# Altium PCB DC_Stepper.PcbDoc
Units mil, origin at the board's own origin, x right, y up, seen from the top; angles counter-clockwise.
Board outline 2362.2 x 3661.42 mil, 2 copper layers (Top Layer, Bottom Layer); 48 components, 46 nets, 243 pads, 79 vias.
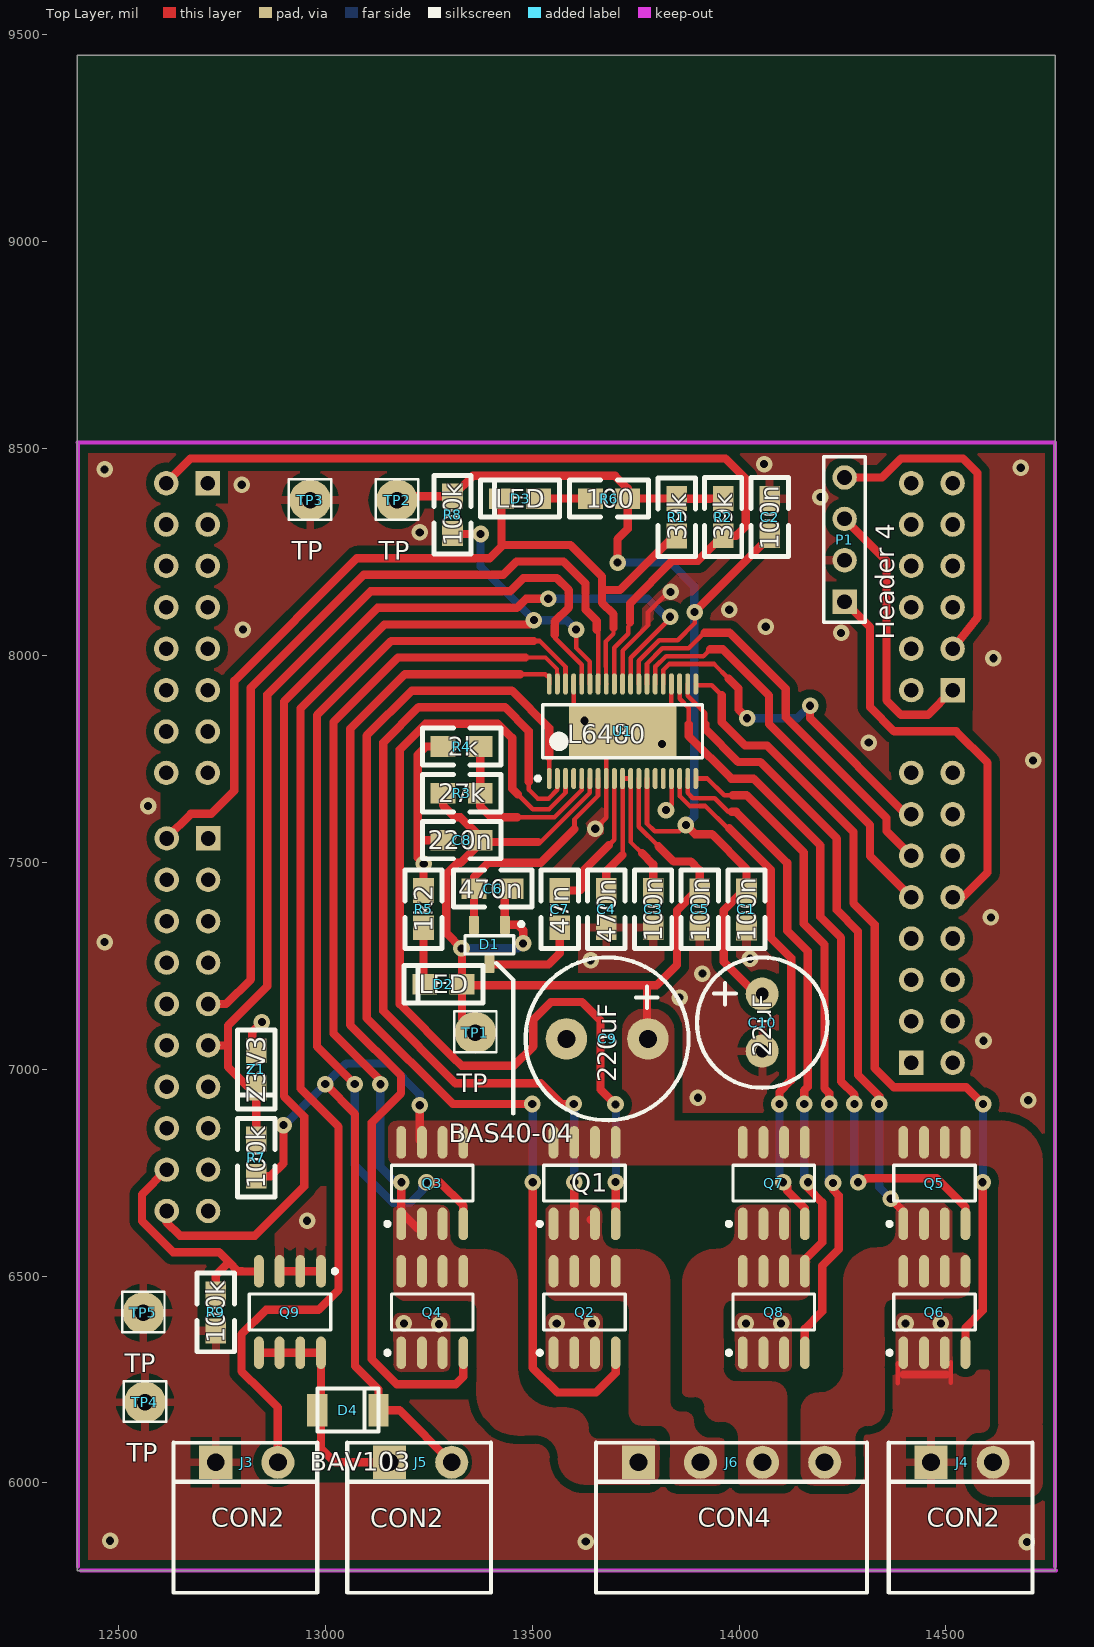
[diagram p0: Top Layer view]
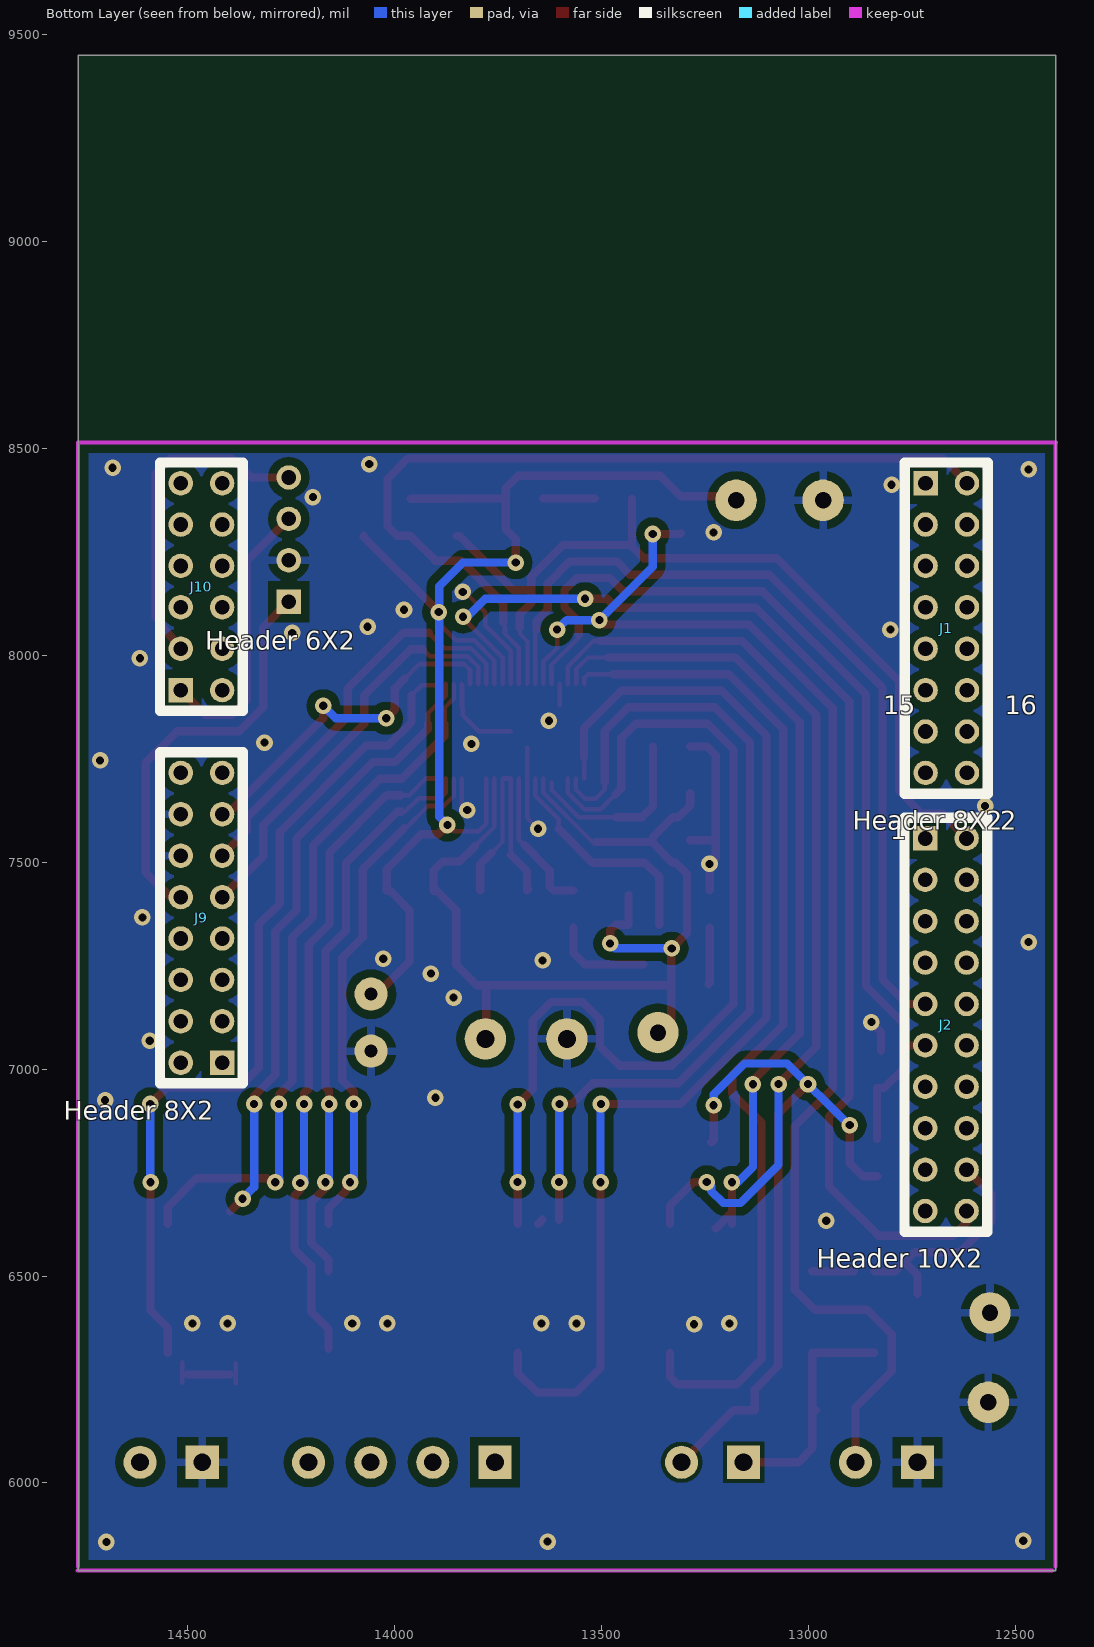
[diagram p1: Bottom Layer view, seen from below]

## Layer stack, top to bottom
Top Solder: solder mask 0.4, Solder Resist, Dk 3.5
Top Layer: signal copper 1.4
Dielectric1: dielectric 12.6, FR-4, Dk 4.8
Bottom Layer: signal copper 1.4
Bottom Solder: solder mask 0.4, Solder Resist, Dk 3.5

## Board outline
12401.57,5787.4 14763.78,5787.4 14763.78,9448.82 12401.57,9448.82 12401.57,5787.4

## Design rules (kind name [scope] priority, off if disabled: settings)
Clearance [All] p1 off: gap=20
Clearance L6480 [(InComponent('U*'))and ispad vs (InComponent('U*'))and ispad] p2: gap=7
Clearance "Schematic Clearance Constraint" [InNetClass('NetL6480')] p3: gap=8 except(7: Via-Text SMDPad-Text Fill-Text Poly-Text Track-Text Text-Text Arc-Text Region-Text THPad-Text)
Clearance Clearance_1 [All] p4: gap=20
PlaneClearance [All] p1: clearance=30
PolygonConnect PolygonConnect_Q [InNet('NetJ6_4')  or InNet('NetJ6_3') or InNet('VS')or InNet('NetJ6_2') or InNet('NetJ6_1') vs OnBottomLayer or OnTopLayer] p1: connectstyle=Direct reliefconductorwidth=10 reliefentries=4 polygonreliefangle="90 Angle" airgapwidth=10
PolygonConnect PolygonConnect_Via [IsVia vs OnBottomLayer Or OnTopLayer] p2: connectstyle=Direct reliefconductorwidth=35 reliefentries=4 polygonreliefangle="90 Angle" airgapwidth=10
PolygonConnect PolygonConnect_1 [All] p3: connectstyle=Relief reliefconductorwidth=20 reliefentries=4 polygonreliefangle="90 Angle" airgapwidth=20
RoutingVias [All] p1: holewidth=20 width=40 viastyle="Through Hole" minholewidth=20 minwidth=40 maxholewidth=20 maxwidth=40
SilkToSolderMaskClearance SilkscreenOverComponentPads [IsPad] p1: minsilkscreentomaskgap=10 clearancetoexposedcopper=TRUE
SolderMaskExpansion [All] p1: expansion=4
UnpouredPolygon [All] p1: allowunpoured=FALSE
Width [All] p1: maxlimit=40 minlimit=10 preferedwidth=20
27 further rules are at their usual default settings.

## Classes and differential pairs
net class NetL6480: 3V3 5V GND INT3V3 IRQ NetC2_1 NetC3_1 NetC4_1 NetC5_1 NetC6_1 NetC7_1 NetC7_2 NetD2_K NetD3_A NetD3_K NetD4_A NetJ1_2 NetJ2_9 NetJ2_11 NetJ2_18 NetJ3_2 NetJ6_1 NetJ6_2 NetJ6_3 NetJ6_4 NetQ1_4 NetQ2_4 NetQ3_4 NetQ4_4 NetQ5_4 NetQ6_4 NetQ7_4 NetQ8_4 NetR3_1 PTA4 SPI0_CLK SPI0_CS SPI0_MISO SPI0_MOSI SPI1_CS SPI1_MISO SPI1_MOSI SPI1_SCLK UART0_RX UART0_TX VS

## Components (designator, comment, footprint, x,y, rotation, side; value= is the part's Value field where it differs from the comment)
C1 "100n" 0805 14018.06,7430.87 r270 top
C2 "100n" 0805 14074,8288.46 r90 top
C3 "100n" 0805 13792.52,7431.28 r270 top
C4 "470n" 0805 13679.52,7431.28 r270 top
C5 "100n" 0805 13905.06,7430.87 r270 top
C6 "470n" 0805 13359.77,7435.87 r0 top
C7 "47n" 0805 13567,7431.28 r270 top
C8 "220n" 0805 13285,7553 r0 top
C9 "220uF" ELKO_220UF 13681.43,7073 r180 top
C10 "22uF" ELKO_22UF 14056,7112.1 r270 top
D1 "BAS40-04" "SOT-23 3L" 13397,7301 r90 top
D2 "LED" LED 13331,7205 r180 top
D3 "LED" LED 13516,8378 r180 top
D4 "BAV103" SOD-80 12981.36,6176 r0 top
J1 "Header 8X2" HDR2X8 12716.54,8415.35 r270 bottom
J2 "Header 10X2" HDR2X10 12717.52,7557.09 r270 bottom
J3 "CON2" HEADER_1X2_3.81 12736,6050 r270 top
J4 "CON2" HEADER_1X2_3.81 14464,6050 r270 top
J5 "CON2" HEADER_1X2_3.81 13156,6050 r270 top
J6 "CON4" Header_1x4_3.81-H 13757,6050 r270 top
J9 "Header 8X2" HDR2X8 14415.94,7015.35 r90 bottom
J10 "Header 6X2" HDR2X6 14515.95,7915.35 r90 bottom
P1 "Header 4" HDR1X4 14255,8129 r90 top
Q1 "Si4178DY" SO-8_N 13627,6724.43 r90 top
Q2 "Si4178DY" SO-8_N 13627,6413 r90 top
Q3 "Si4178DY" SO-8_N 13259,6724.43 r90 top
Q4 "Si4178DY" SO-8_N 13259,6413 r90 top
Q5 "Si4178DY" SO-8_N 14472,6724.43 r90 top
Q6 "Si4178DY" SO-8_N 14472,6413 r90 top
Q7 "Si4178DY" SO-8_N 14084,6724.43 r90 top
Q8 "Si4178DY" SO-8_N 14084,6413 r90 top
Q9 "Si4178DY" SO-8_N 12915.18,6413 r270 top
R1 "39k" 0805 13849.39,8287.91 r90 top
R2 "39k" 0805 13961.59,8288.46 r90 top
R3 "27k" 0805 13375,7666 r180 top
R4 "2k" 0805 13285,7779 r0 top
R5 "1k2" 0805 13238,7431.28 r270 top
R6 "100" 0805 13641,8378 r0 top
R7 "100k" 0805 12834,6831 r270 top
R8 "100k" 0805 13308,8294 r90 top
R9 "100k" 0805 12736,6367 r90 top
TP1 "TP" TP2.54-1.0 13363,7088 r0 top
TP2 "TP" TP2.54-1.0 13174,8374 r0 top
TP3 "TP" TP2.54-1.0 12964,8374 r0 top
TP4 "TP" TP2.54-1.0 12565,6195 r0 top
TP5 "TP" TP2.54-1.0 12561,6411 r0 top
U1 "L6480" HTSSOP38 13895.8,7701.84 r90 top
Z1 "Z3V3" LED 12834,7044 r270 top

## Footprints (in the part's own frame and the unit in brackets; to place one, negate y for a bottom-side part, rotate by r counter-clockwise, add the part's x,y. Pads: shape width x height; smd on the part's side, far side on the other; paste and mask are expansions set on the pad)
0805 [mil]
  rect 60x50 smd: 1(0,0) 2(90,0)
  silkscreen extent -50,-45 140,45
ELKO_22UF [mil] "NKR220M1CE11VU"
  round 80 hole 31: A(-68.9,0) K(68.9,0)
  silkscreen extent -157,-157 157,157
ELKO_220UF [mm]
  round 2.54 hole 1.1: A(-2.5,0) K(2.5,0)
  silkscreen extent -5,-5 5,5
HDR1X4 [mm] "Connector; Header; 4 Position"
  rect 1.5x1.5 hole 0.9: 1(0,0)
  round 1.5 hole 0.9: 2(2.54,0) 3(5.08,0) 4(7.62,0)
  silkscreen extent -1.27,-1.27 8.89,1.27
HDR2X6 [mm]
  rect 1.5x1.5 hole 0.9: 1(0,0)
  round 1.5 hole 0.9: 2(0,-2.54) 3(2.54,0) 4(2.54,-2.54) 5(5.08,0) 6(5.08,-2.54) 7(7.62,0) 8(7.62,-2.54) 9(10.16,0) 10(10.16,-2.54) 11(12.7,0) 12(12.7,-2.54)
  silkscreen extent -1.27,-3.81 13.97,1.27
HDR2X8 [mm] "Connector; Header; 8x2 Position"
  rect 1.5x1.5 hole 0.9: 1(0,0)
  round 1.5 hole 0.9: 2(0,2.54) 3(2.54,0) 4(2.54,2.54) 5(5.08,0) 6(5.08,2.54) 7(7.62,0) 8(7.62,2.54) 9(10.16,0) 10(10.16,2.54) 11(12.7,0) 12(12.7,2.54) 13(15.24,0) 14(15.24,2.54) 15(17.78,0) 16(17.78,2.54)
  silkscreen extent -1.27,-1.27 19.05,3.81
HDR2X10 [mm] "Connector; Header; 10x2 Position"
  rect 1.5x1.5 hole 0.9: 1(0,0)
  round 1.5 hole 0.9: 2(0,2.54) 3(2.54,0) 4(2.54,2.54) 5(5.08,0) 6(5.08,2.54) 7(7.62,0) 8(7.62,2.54) 9(10.16,0) 10(10.16,2.54) 11(12.7,0) 12(12.7,2.54) 13(15.24,0) 14(15.24,2.54) 15(17.78,0) 16(17.78,2.54) 17(20.32,0) 18(20.32,2.54) 19(22.86,0) 20(22.86,2.54)
  silkscreen extent -1.27,-1.27 24.13,3.81
HEADER_1X2_3.81 [mil]
  rect 80x80 hole 43.31: 1(0,0)
  round 80 hole 43.31: 2(0,150)
  silkscreen extent -47,-102 315,245
Header_1x4_3.81-H [mil]
  rect 80x80 hole 43.31: 1(0,0)
  round 80 hole 43.31: 2(0,150) 3(0,300) 4(0,450)
  silkscreen extent -47,-102 315,552
HTSSOP38 [mm] "L6480"
  rect 3.3x6.6 smd: 0(2.9,4.5)
  oval 1.3x0.3 smd: 1(0,9) 2(0,8.5) 3(0,8) 4(0,7.5) 5(0,7) 6(0,6.5) 7(0,6) 8(0,5.5) 9(0,5) 10(0,4.5) 11(0,4) 12(0,3.5) 13(0,3) 14(0,2.5) 15(0,2) 16(0,1.5) 17(0,1) 18(0,0.5) 19(0,0) 20(5.8,0) 21(5.8,0.5) 22(5.8,1) 23(5.8,1.5) 24(5.8,2) 25(5.8,2.5) 26(5.8,3) 27(5.8,3.5) 28(5.8,4) 29(5.8,4.5) 30(5.8,5) 31(5.8,5.5) 32(5.8,6) 33(5.8,6.5) 34(5.8,7) 35(5.8,7.5) 36(5.8,8) 37(5.8,8.5) 38(5.8,9)
  silkscreen extent -0.12,-0.4 4.52,9.82
LED [mil]
  rect 60x50 smd: A(0,0) K(90,0)
  silkscreen extent -50,-45 140,45
SO-8_N [mm] "SOIC, 8-Leads, Body 4.9x3.9mm, Pitch 1.27mm, IPC Medium Density"
  oval 2x0.6 smd: 1(-2.5,1.905) 2(-2.5,0.635) 3(-2.5,-0.635) 4(-2.5,-1.905) 5(2.5,-1.905) 6(2.5,-0.635) 7(2.5,0.635) 8(2.5,1.905)
  silkscreen extent -2.62,-2.5 1.1,2.88, body extent -2,-2.5 2,2.5, height 1.75
SOD-80 [mm]
  rect 1.25x2 smd: A(0,0) K(3.75,0)
  silkscreen extent 0,-1.32 3.75,1.32
"SOT-23 3L" [mm]
  rrect12% 1.1x0.6 smd: 1(1.2,-0.95) 2(1.2,0.95) 3(-1.2,0)
  silkscreen extent -0.58,-2.08 1.37,1.5, body extent -0.87,-1.5 0.87,1.5, height 1.1
TP2.54-1.0 [mm]
  round 2.54 hole 1: 1(0,0)
  silkscreen extent -1.3,-1.2 1.3,1.3

## Part data
C1 C2 C3 C4 C5 C6 C7 C8: library part C?, "Normaler Kondensator"
C9: library part "C? ELKO", "Elektrolyt /polarisierter Kondensator"
C10: library part ELKO_22uF
D1: library part BAV99
D4: library part D?, "Diode"
J1 J9: "Header, 8-Pin, Dual row"
J2: "Header, 10-Pin, Dual row"
J6: library part HEADER_4, "1x4_3.81-H"
J10: "Header, 6-Pin, Dual row"
P1: "Header, 4-Pin"
Q1 Q2 Q3 Q4 Q5 Q6 Q7 Q8 Q9: library part SI4412DY, "N-Channel 30V (D-S)  Rated MOSFET"
R1 R2 R3 R4 R5 R6 R7 R8 R9: library part R?, "Normaler Widerstand"
Z1: library part ZENER2

## Via types
v1: diameter 40, hole 19.68, Top Layer to Bottom Layer, tented both sides, 79 vias

## Nets (pads, with @x,y where several pads share a name; then routed paths per layer and width w, separated by ;. In a path a pad name is that pad's centre, name@x,y a point inside that pad or via, vN(x,y) a via of type N, cw(c..) or ccw(c..) an arc to the next point about the centre after c; other vN are vias at no path point)
3V3: J9.4
5V: J9.10 P1.1 | length 969.2
  Top Layer w20: P1.1 14316.42,8067.58 14316.42,7874.13 14374.72,7815.83 14524.66,7815.83 14600.47,7740.01 14600.47,7474.88 J9.10@14540.95,7415.35
GND: C1.2 C2.2 C3.2 C4.2 C5.2 C8.1 C9.K C10.K J3.1 J4.1 J9.12 J9.14 P1.2 Q2.1 Q2.2 Q2.3 Q4.1 Q4.2 Q4.3 Q6.1 Q6.2 Q6.3 Q8.1 Q8.2 Q8.3 Q9.1 Q9.2 Q9.3 R4.1 R5.1 R9.1 TP3.1 TP4.1 TP5.1 U1.0 U1.8 U1.16 U1.23 U1.29 U1.35 Z1.A | length 1645.1
  Top Layer w11: U1.35 13600.81,7929.91 U1.0@13600.81,7879.1 ; v1(13652.59,7580.46) 13679.27,7607.14 U1.8 U1.0@13679.27,7776.65 ; U1.0 13796.14,7816.02 13834.59,7854.46 13834.59,7872.46 13836.47,7874.34 13836.47,7929.91 U1.23 ; U1.29 13718.64,8010.38 13780.16,8071.9 13780.16,8103.38 13829.24,8152.46 v1(13834.59,8152.46) ; U1.16 13837.03,7701.56 v1@13837.03,7638.9 ; 14382.96,6240.46 14382.96,6289.77 ; 14511.96,6242.46 14511.96,6291.77
  Top Layer w20: Z1.A@12824,7044 12824,7089.87 v1(12847.59,7113.46) ; Q9.3 Q9.2 Q9.1 ; 13227.6,7552.46 13228.13,7553 C8.1 ; R5.1 13238,7495.46 v1(13238.59,7495.46) 13223.6,7510.46 13223.6,7758.46 13244.14,7779 R4.1 ; 14397.59,6262.09 14499.9,6262.09
  other v1: 14695.59,5857.46 13629.59,5858.46 12480.59,5860.46 13275.59,6383.46 13190.59,6385.46 13559.59,6385.46 13644.59,6385.46 14016.59,6385.46 14101.59,6385.46 14402.59,6385.46 14487.59,6385.46 12956.59,6633.46 14698.59,6924.46 13900.59,6930.46 14590.59,7068.46 13856.59,7172.46 13911.59,7230.46 13641.59,7262.46 14026.59,7266.46 12467.59,7306.46 14608.59,7366.46 13823.59,7625.46 12572.59,7635.46 14710.59,7745.46 13813.59,7785.46 14313.59,7788.46 13626.59,7841.46 14614.59,7992.46 14246.59,8053.46 12801.59,8061.46 14064.59,8068.46 13976.59,8109.46 13228.59,8296.46 14196.59,8381.46 12798.59,8411.46 12467.59,8448.46 14680.59,8452.46 14060.59,8461.46
INT3V3: C1.1 C2.1 C10.A R1.2 R2.2 R6.2 R8.2 TP2.1 U1.13 U1.27 | length 3066.3
  Top Layer w11: U1.27 13758.01,7986.56 13806.91,8035.46 13851.59,8035.46 13892.59,8076.46 v1(13892.59,8103.96) ; U1.13 13777.69,7592.69 13796.25,7574.13 13856.25,7574.13 v1(13871.59,7589.46)
  Top Layer w20: TP2.1 13184,8384 R8.2 13357,8433 13701,8433 13731,8403 R6.2 ; v1(13706.59,8223.46) 13706.59,8280.06 13731,8304.46 R6.2 ; v1(13871.59,7589.46) 13893.8,7567.26 13934.23,7567.26 14018.06,7483.43 C1.1 ; v1(13892.59,8103.96) 14074,8285.37 C2.1 ; R2.2@13961.04,8377.91 R1.2 13849.3,8378 R6.2 ; C1.1@14010.63,7430.87 13963.06,7383.3 13963.06,7259.29 C10.A@14041.34,7181
  Bottom Layer w20: v1(13706.59,8223.46) 13834.3,8223.46 13891.59,8166.18 13891.59,7609.46 v1@13884.59,7602.46
IRQ: J2.19
NetC2_1: 
NetC3_1: C3.1 C4.1 U1.10 U1.11 | length 603.6
  Top Layer w10: U1.11 13738.32,7548.62 13765.59,7521.35
  Top Layer w11: 13718.64,7517.23 U1.10 U1.11
  Top Layer w20: C4.1@13676.59,7434.21 C4.1 13679.52,7478.11 13718.64,7517.23 ; 13765.59,7521.35 13792.52,7494.42 C3.1
NetC4_1: 
NetC5_1: 
NetC6_1: C6.1 D1.2 U1.7 | length 551.9
  Top Layer w11: 13602.59,7579.7 13602.59,7603.04 13659.3,7659.75 13659.3,7701.56 U1.7
  Top Layer w20: D1.2 C6.1@13359.6,7435.7 ; C6.1 13359.77,7463.65 13394.13,7498 13520.89,7498 13602.59,7579.7
NetC7_1: C7.1 U1.9 | length 353.5
  Top Layer w11: 13685.59,7540.75 13698.95,7554.12 U1.9
  Top Layer w20: C7.1 13615.34,7431.28 13624.52,7440.46 13624.52,7479.68 13685.59,7540.75
NetC7_2: C7.2 D1.3 | length 241.5
  Top Layer w20: D1.3@13398.17,7252.59 13539.72,7252.59 13567,7279.87 C7.2
NetD2_K: D2.K R5.2 | length 137.5
  Top Layer w20: R5.2 13238,7208 D2.K
NetD3_A: D3.A R6.1 | length 125
  Top Layer w20: D3.A R6.1
NetD3_K: D3.K J2.2 R1.1 U1.31 | length 2158
  Top Layer w10: U1.31 13678.49,7930.97 13678.49,7971.78 13678.08,7972.19 13678.08,8032.96 13696.59,8051.46 13696.59,8065.67
  Top Layer w20: J2.2@12617.52,7558.57 12675.57,7616.61 12724.74,7616.61 12780.64,7672.51 12780.64,7937.75 13076.89,8234 13398.13,8234 13426,8261.87 D3.K ; 13427.54,8266 13592.85,8266 13669,8189.85 13669,8157.46 ; 13696.59,8065.67 13696.59,8098.74 13669,8126.33 13669,8157.46 ; R1.1 13842.76,8287.91 13712.31,8157.46 13669,8157.46
NetD4_A: D4.A J5.1 Q9.5 Q9.6 Q9.7 Q9.8 | length 563.4
  Top Layer w20: Q9.5 Q9.6 Q9.7 Q9.8@12981.18,6314.57 ; D4.A D4.A@12989.59,6167.77 ; 12989.59,6084.46 13024.06,6050 J5.1 ; 12990.18,6084.46 Q9.8
NetJ1_2: J1.2 R2.1 U1.30 | length 2116
  Top Layer w11: U1.30 13698.95,8017.83 13732.59,8051.46 13732.59,8068.18
  Top Layer w20: J1.2 12616.54,8416.84 12674.58,8474.88 13967.54,8474.88 14016.59,8425.84 14016.59,8311.46 13993.59,8288.46 R2.1 13901.04,8227.91 13839.33,8227.91 13736.59,8125.18 13736.59,8078.54
NetJ2_9: J2.9 U1.32 | length 2045.6
  Top Layer w11: U1.32 13659.58,8057.97
  Top Layer w20: J2.9@12709.95,7157.09 J2.9@12713.74,7160.87 ; J2.9 12760.95,7157.09 12820.64,7216.77 12820.64,7921.18 13093.46,8194 13430.28,8194 13462.28,8226 13576.28,8226 13629,8173.28 13629,8109.77 13656.59,8082.18 13656.59,8060.96
NetJ2_11: J2.11 R7.1 U1.34 Z1.K | length 2323.2
  Top Layer w11: 13554.59,8048.94 13554.59,8042.29 13620.21,7976.66 U1.34
  Top Layer w20: J2.11 12764.16,7057.09 ; R7.1 Z1.K 12816.57,6954 12765.54,7005.04 12765.54,7105.1 12860.64,7200.2 12860.64,7904.61 13110.03,8154 13446.85,8154 13478.85,8186 13559.71,8186 13589,8156.71 13589,8115.29 13554.59,8080.88 13554.59,8048.94
NetJ2_18: J2.18 Q9.4 R9.2 | length 572.7
  Top Layer w20: J2.18 12557.59,6697.16 12557.59,6632.83 12632.86,6557.56 12743.55,6557.56 12767.62,6533.49 ; R9.2 12736,6501.87 12767.62,6533.49 ; 12790.18,6510.93 12767.62,6533.49 ; 12790.68,6511.43 12799.68,6511.43 12799.18,6510.93 12839.68,6510.93 Q9.4
NetJ3_2: J3.2 R8.1 U1.33 | length 3305.4
  Top Layer w11: v1(13606.59,8061.46) 13606.59,8017.16 13639.9,7983.85 U1.33
  Top Layer w20: J3.2 12886,6182.46 12823.26,6245.2 12822.86,6245.2 12798.37,6269.7 12798.37,6359.45 12857.38,6418.46 12983.91,6418.46 13031.99,6466.55 ; 13032.59,6466.55 13032.59,6860.75 12940.64,6952.71 12940.64,7871.48 13143.16,8074 13494.13,8074 v1(13504.59,8084.46) ; R8.1 13309.54,8292.46 v1(13375.59,8292.46)
  Bottom Layer w20: v1(13375.59,8292.46) 13375.59,8213.46 v1(13504.59,8084.46) 13583.59,8084.46 v1(13606.59,8061.46)
NetJ6_1: J6.1 Q3.1 Q3.2 Q3.3 Q4.5 Q4.6 Q4.7 Q4.8 U1.37 | length 2010.8
  Top Layer w10: 13484.19,7994 13532.45,7994 13560.38,7966.08 13560.38,7930.97 U1.37 13561.16,7955.82
  Top Layer w20: v1(13133.59,6963.15) 13133.59,6972.29 13020.64,7085.24 13020.64,7838.34 13176.3,7994 13484.19,7994 ; Q3.1 13184,6725.87 v1(13184.59,6726.46) ; Q3.1@13191.72,6646.46 Q3.2@13223.13,6615.06
  Bottom Layer w20: v1(13133.59,6963.15) 13133.59,6763.32 13170.45,6726.46 v1(13184.59,6726.46)
NetJ6_2: J6.2 Q1.1 Q1.2 Q1.3 Q2.5 Q2.6 Q2.7 Q2.8 U1.2 | length 2161.6
  Top Layer w11: 13491.9,7693.7 13491.9,7675.15 13513.59,7653.46 13540.22,7653.46 13561.16,7674.4 U1.2
  Top Layer w20: 13491.9,7693.7 13491.9,7816.58 13434.49,7874 13226.01,7874 13140.64,7788.63 13140.64,7139.95 13315.12,6965.46 13521.3,6965.46 13571.09,6915.68 v1(13600.81,6915.68) ; Q1.2@13602,6636 v1(13602,6727) ; Q1.3@13642,6636 Q1.3
  Bottom Layer w20: v1@13601.81,6727.19 v1@13601.81,6915.68
NetJ6_3: J6.3 Q7.1 Q7.2 Q7.3 Q8.5 Q8.6 Q8.7 Q8.8 U1.18 | length 1370.2
  Top Layer w11: U1.18 13876.12,7666.94 13888.58,7654.47 13941.35,7654.47 13974.36,7621.46
  Top Layer w20: 13982.8,7621.46 13993.16,7621.46 14116.42,7498.21 14116.42,7334.21 14166,7284.62 14166,6956.43 14157.59,6948.02 v1(14157.59,6915.46) ; Q8.5 14159,6539.65 14175.98,6556.63 14176.32,6556.63 14200.81,6581.12 14200.81,6678.1 14166.59,6712.32 v1(14166.59,6726.46)
  Bottom Layer w20: v1@14157.59,6735.46 v1(14157.59,6915.46)
NetJ6_4: J6.4 Q5.1 Q5.2 Q5.3 Q6.5 Q6.6 Q6.7 Q6.8 U1.21 | length 1521.3
  Top Layer w11: U1.21 13876.12,7901.56 13918.56,7859.12 13918.56,7833.46
  Top Layer w20: 13918.56,7833.46 13918.56,7821.06 13998.16,7741.46 14051.43,7741.46 14236.42,7556.48 14236.42,7383.91 14287.59,7332.74 14287.59,6985.66 14338.59,6934.66 v1(14338.59,6915.46) ; v1(14366.59,6686.46) Q5.1@14397,6656.06
  Bottom Layer w20: v1(14338.59,6915.46) 14338.59,6714.46 v1(14366.59,6686.46) v1@14366.69,6686.56 ; v1@14346.69,6915.46 v1@14346.69,6915.56
NetQ1_4: Q1.4 U1.3 | length 2423.5
  Top Layer w11: 13465.57,7663.46 13501.57,7627.46 13541.09,7627.46 13580.84,7667.21 U1.3
  Top Layer w20: 13465.57,7663.46 13451.9,7677.13 13451.9,7800.01 13451.41,7800.01 13417.43,7834 13242.57,7834 13180.64,7772.06 13180.64,7156.52 13307.69,7029.46 13308.4,7029.46 13329.86,7008 13456.13,7008 13503,7054.87 13503,7119.87 13545.23,7162.1 13620.95,7162.1 13665.59,7117.46 13665.59,6950.46 v1(13701.59,6914.46) ; Q1.4 v1(13702,6726.87)
  Bottom Layer w20: v1(13702,6726.87) 13702.59,6727.46 v1@13702.59,6914.46
NetQ2_4: Q2.4 U1.1 | length 2743.7
  Top Layer w11: U1.1 13541.47,7752.62
  Top Layer w20: v1(13500.59,6915.46) 13308.55,6915.46 13100.64,7123.38 13100.64,7805.2 13209.44,7914 13451.06,7914 13541.47,7823.58 13541.47,7752.62 ; v1(13501.59,6726.46) 13501.59,6278.3 13561.42,6218.46 13654.59,6218.46 13702,6265.87 Q2.4
  Bottom Layer w20: v1(13501.59,6726.46) v1@13501.59,6915.46
NetQ3_4: Q3.4 U1.36 | length 2261.3
  Top Layer w11: 13504.06,8034 13519.06,8034 13580.84,7972.21 U1.36
  Top Layer w20: v1(13071.59,6963.58) 12980.64,7054.53 12980.64,7854.91 13159.73,8034 13504.06,8034 ; v1(13245,6727) 13276.87,6727 13334,6669.87 Q3.4
  Bottom Layer w20: v1(13071.59,6963.58) 13071.59,6768.75 13163.88,6676.46 13205.3,6676.46 13234.59,6705.75 13234.59,6716.59 v1(13245,6727)
NetQ4_4: Q4.4 U1.38 | length 2468.6
  Top Layer w11: 13471.59,7954 13532.06,7954 13541.47,7944.58 U1.38
  Top Layer w20: Q4.4 13334,6256.87 13315.59,6238.46 13173.42,6238.46 13112.59,6299.3 13112.99,6299.7 13112.99,6870.87 13183.59,6941.46 13183.59,6983.86 13060.64,7106.81 13060.64,7821.77 13192.87,7954 13471.59,7954
NetQ5_4: Q5.4 U1.22 | length 1733
  Top Layer w11: U1.22 13856.71,7929.91 13856.71,7894.09 13878.56,7872.25 13878.56,7833.46
  Top Layer w20: 13878.56,7833.46 13878.56,7804.5 13981.59,7701.46 14034.86,7701.46 14196.42,7539.91 14196.42,7367.34 14246.59,7317.17 14246.59,6970.09 14278.59,6938.09 v1(14278.59,6915.46) ; v1@14297.59,6726.46 14307.59,6736.46 14477.41,6736.46 14547,6666.87 Q5.4
  Bottom Layer w20: v1@14277.59,6726.46 v1@14277.59,6735.46 ; v1@14278.59,6735.46 v1(14278.59,6915.46)
  other v1: 14287.59,6726.46
NetQ6_4: Q6.4 U1.20 | length 2074
  Top Layer w11: U1.20 13898.53,7927.46 13934.09,7927.46 13958.56,7903
  Top Layer w20: 13958.56,7903 13958.56,7837.63 14014.73,7781.46 14068,7781.46 14276.42,7573.05 14276.42,7400.48 14327.59,7349.31 14327.59,7002.23 14373.99,6955.83 14549.23,6955.83 v1(14589.59,6915.46) ; Q6.4 14547,6374.87 14588.81,6416.69 v1@14588.81,6726.46
  Bottom Layer w20: v1@14589.59,6727.46 v1(14589.59,6915.46)
  other v1: 14588.59,6726.46
NetQ7_4: Q7.4 U1.17 | length 1245.2
  Top Layer w11: U1.17 13856.71,7701.56 13856.71,7659.47 13880.71,7635.47 13918.58,7635.47 13972.59,7581.46
  Top Layer w20: 13976.59,7581.46 14076.42,7481.64 14076.42,7317.64 14126,7268.06 14126,6972.99 14097.59,6944.58 v1(14097.59,6915.46) ; v1(14106.59,6726.46) 14116.59,6716.46 14116.59,6705.75 14159,6663.34 Q7.4
  Bottom Layer w20: v1(14097.59,6915.46) 14097.59,6735.46 v1(14106.59,6726.46)
NetQ8_4: Q8.4 U1.19 | length 1594.5
  Top Layer w11: U1.19 13923.59,7701.84 13963.97,7661.46 13984.56,7661.46
  Top Layer w20: 13984.56,7661.46 14018.3,7661.46 14156.42,7523.34 14156.42,7350.77 14206.59,7300.6 14206.59,6957.18 ; Q8.4@14159,6324.57 14159,6372.46 14200.81,6414.28 14200.81,6524.55 14240.81,6564.55 14240.81,6694.67 14227.09,6708.39 v1(14227.09,6724.82) ; 14206.59,6953.52 14217.88,6942.23 v1(14217.88,6915.46)
  Bottom Layer w20: v1@14216.88,6725.03 v1@14216.88,6734.03 ; v1@14217.88,6734.03 v1(14217.88,6915.46)
NetR3_1: R3.1 R4.2 U1.5 | length 445.4
  Top Layer w11: 13464,7608.46 13554.28,7608.46 13619.93,7674.12 U1.5@13619.93,7692.19
  Top Layer w20: R4.2 R3.1 13375,7634.62 13401.16,7608.46 13464,7608.46
PTA4: 
SPI0_CLK: J2.12
SPI0_CS: J2.6
SPI0_MISO: J2.10
SPI0_MOSI: J2.8
SPI1_CS: J9.13 U1.24 | length 857.8
  Top Layer w11: U1.24 13817.06,7963.94 13831.59,7978.46 13939.66,7978.46 13975.13,7943
  Top Layer w20: 13975.13,7943 13998.56,7919.56 13998.56,7868.5 v1(14019.59,7847.46) ; v1(14171.59,7877.46) 14171.59,7847.58 J9.13@14403.82,7615.35 ; J9.13@14409.88,7621.42 J9.13
  Bottom Layer w20: v1(14019.59,7847.46) 14141.59,7847.46 v1(14171.59,7877.46)
SPI1_MISO: J2.20 U1.28 | length 2832.1
  Top Layer w11: U1.28 13738.32,7993.74 13833.59,8089.01 v1(13833.59,8092.46)
  Top Layer w20: J2.20@12617.52,6629.47 12649.43,6597.56 12830.67,6597.56 12949.59,6716.48 12949.59,6885.18 12900.64,6934.13 12900.64,7888.04 13126.59,8114 13463.42,8114 13485.42,8136 v1(13539,8136)
  Bottom Layer w20: v1(13539,8136) 13780.34,8136 v1@13823.88,8092.46
SPI1_MOSI: J9.11 U1.26 | length 1000
  Top Layer w11: U1.26 13777.69,7979.37 13814.78,8016.46 13878.87,8016.46 13916.37,8053.96
  Top Layer w20: 13916.37,8053.96 13977.3,8053.96 14112.59,7918.67 14112.59,7850.01 14356.42,7606.19 14356.42,7574.88 J9.11
SPI1_SCLK: J9.9 U1.25 | length 1010.2
  Top Layer w11: U1.25 13797.66,7930.47 13797.66,7971.4 13823.72,7997.46 13914.09,7997.46 13930.59,8013.96 ; 13797.38,7972.19 13798.06,7972.87
  Top Layer w20: 13930.59,8013.96 13960.73,8013.96 14072.59,7902.1 14072.59,7833.44 14316.42,7589.62 14316.42,7514.88 J9.9
UART0_RX: J10.3 P1.4 | length 799.8
  Top Layer w20: P1.4 14345.41,8429 14391.29,8474.88 14541.19,8474.88 14576.06,8440.01 14576.06,8090.7 J10.3@14516.54,8015.36
UART0_TX: J10.1 P1.3 | length 678.9
  Top Layer w20: P1.3 14356.42,8227.58 14356.42,7890.7 14391.29,7855.83 14456.42,7855.83 J10.1
VS: C5.1 C6.2 C8.2 C9.A D1.1 D2.A D4.K J4.2 J5.2 Q1.5 Q1.6 Q1.7 Q1.8 Q3.5 Q3.6 Q3.7 Q3.8 Q5.5 Q5.6 Q5.7 Q5.8 Q7.5 Q7.6 Q7.7 Q7.8 R3.2 R7.2 TP1.1 U1.6 U1.12 | length 4348.8
  Top Layer w11: 13521.22,7548.54 13639.9,7667.21 U1.6 ; U1.12 13758.01,7585.5 13805.59,7537.92
  Top Layer w20: R7.2@12833.59,6740.59 R7.2 12868.59,6741 12899.59,6772 v1(12899.59,6864.46) ; v1(13000.59,6963.46) 13072.59,6891.46 13072.59,6282.73 13129,6226.32 D4.K 13180,6176 J5.2 ; v1(13228.59,6912.46) 13228.59,6828.26 Q3.7 ; R3.2 13285,7637.06 13314.06,7608 13327.43,7608 13375,7560.43 C8.2 C8.2@13375,7548.54 ; v1(13329.59,7291.46) 13293,7328.06 13293,7471 13320,7498 13327.43,7498 13375,7545.57 C8.2@13375,7548.54 ; v1@13331,7290.06 D2.A D2.A@13331,7202.1 ; TP1.1 13331,7120 D2.A@13331,7202.1 ; C6.2@13434.4,7420.5 D1.1 13465.81,7348.24 13478.59,7335.46 v1(13478.59,7303.46) ; 13514.86,7548.54 C8.2@13375,7548.54 ; C9.A@13777.85,7069 13777.85,7196.46 ; 13805.59,7537.92 13842.04,7501.46 13883.59,7501.46 13905.06,7480 C5.1 13897.63,7430.87 13850.06,7383.3 13850.06,7251.57 13800.59,7202.1 D2.A@13331,7202.1
  Bottom Layer w20: v1@12900.68,6863.38 13050.88,7013.58 13153.87,7013.58 13228.59,6938.86 v1(13228.59,6912.46) ; v1(13329.59,7291.46) 13466.59,7291.46 v1(13478.59,7303.46)
pads on no net: J1.1 J1.3 J1.4 J1.5 J1.6 J1.7 J1.8 J1.9 J1.10 J1.11 J1.12 J1.13 J1.14 J1.15 J1.16 J2.1 J2.3 J2.4 J2.5 J2.7 J2.13 J2.14 J2.15 J2.16 J2.17 J9.1 J9.2 J9.3 J9.5 J9.6 J9.7 J9.8 J9.15 J9.16 J10.2 J10.4 J10.5 J10.6 J10.7 J10.8 J10.9 J10.10 J10.11 J10.12 U1.4 U1.14 U1.15

## Polygon pours and split planes (outlines as drawn)
NetJ6_4 on Top Layer "Top Layer-No Net 1" (solid, remove dead copper, pour order 50): 14493.59,6556.46 14539.59,6556.46 cw(c14539.59,6538.46) 14557.59,6538.46 14557.59,6472.46 cw(c14531.59,6472.46) 14531.59,6446.46 14474.59,6446.46 ccw(c14474.59,6445.46) 14473.59,6445.46 14473.59,6550.46 cw(c14476.59,6550.46) 14476.59,6553.46 14498.59,6553.46 ccw(c14498.59,6557.46) 14502.59,6557.46
NetJ6_3 on Top Layer "Top Layer-No Net 1" (solid, remove dead copper, pour order 51): 14107.59,6551.46 14153.59,6551.46 cw(c14153.59,6533.46) 14171.59,6533.46 14171.59,6467.46 cw(c14145.59,6467.46) 14145.59,6441.46 14088.59,6441.46 ccw(c14088.59,6440.46) 14087.59,6440.46 14087.59,6545.46 cw(c14090.59,6545.46) 14090.59,6548.46 14112.59,6548.46 ccw(c14112.59,6552.46) 14116.59,6552.46
VS on Top Layer "Top Layer-No Net 1" (solid, remove dead copper, pour order 48): 13788.99,7145.5 13770.99,7145.5 ccw(c13770.99,7092.5) 13717.99,7092.5 13717.99,6844.5 ccw(c13735.99,6844.5) 13735.99,6826.5 13783.99,6826.5 ccw(c13783.99,6847.5) 13804.99,6847.5 13804.99,7124.5 ccw(c13782.99,7124.5) 13782.99,7146.5
VS on Top Layer "Top Layer-No Net 1" (solid, remove dead copper, pour order 49): 13772.59,7145.46 13790.59,7145.46 cw(c13790.59,7092.46) 13843.59,7092.46 13843.59,6844.46 cw(c13825.59,6844.46) 13825.59,6826.46 13777.59,6826.46 cw(c13777.59,6847.46) 13756.59,6847.46 13756.59,7124.46 cw(c13778.59,7124.46) 13778.59,7146.46
NetJ6_2 on Top Layer "Top Layer-No Net 1" (solid, remove dead copper, pour order 47): 13734.02,6277.42 13734.02,6169.04 ccw(c13764.59,6169.04) 13764.59,6138.46 13802.59,6138.46 cw(c13802.59,6107.46) 13833.59,6107.46 13833.59,6015.46 ccw(c13855.59,6015.46) 13855.59,5993.46 13944.59,5993.46 ccw(c13944.59,6013.46) 13964.59,6013.46 13964.59,6098.46 ccw(c13953.59,6098.46) 13953.59,6109.46 13931.59,6109.46 cw(c13931.59,6150.46) 13890.59,6150.46 ccw(c13868.59,6150.46) 13868.59,6172.46 13858.59,6172.46 cw(c13858.59,6197.05) 13834.01,6197.05 13834.01,6273.88
NetJ6_3 on Top Layer "Top Layer-No Net 1" (solid, remove dead copper, pour order 46): 13962.58,6278.42 ccw(c13995.54,6278.42) 13995.54,6245.46 14002.59,6245.46 14079.59,6245.46 cw(c14079.59,6208.46) 14116.59,6208.46 14116.59,6003.46 cw(c14107.59,6003.46) 14107.59,5994.46 14005.59,5994.46 cw(c14005.59,6002.46) 13997.59,6002.46 13997.59,6109.46 ccw(c13959.59,6109.46) 13959.59,6147.46 13951.59,6147.46 cw(c13951.59,6182.46) 13916.59,6182.46 ccw(c13891.59,6182.46) 13891.59,6207.46 13877.59,6207.46 cw(c13877.59,6222.46) 13862.59,6222.46 13862.59,6278.42
NetJ6_4 on Top Layer "Top Layer-No Net 1" (solid, remove dead copper, pour order 45): 14251.59,6277.88 14251.59,6276.46 cw(c14194.59,6276.46) 14194.59,6219.46 ccw(c14194.59,6174.46) 14149.59,6174.46 14149.59,6024.46 ccw(c14180.59,6024.46) 14180.59,5993.46 14238.59,5993.46 14255.59,5993.46 ccw(c14255.59,6019.46) 14281.59,6019.46 14281.59,6109.46 cw(c14309.59,6109.46) 14309.59,6137.46 ccw(c14309.59,6179.45) 14351.58,6179.45 14351.58,6281.42
VS on Top Layer "Top Layer-No Net 1" (solid, pour order 44): 14621.59,6875.46 14633.59,6875.46 cw(c14633.59,6775.46) 14733.59,6775.46 14733.59,6691.46 cw(c14705.59,6691.46) 14705.59,6663.46 14626.59,6663.46 14626.59,6733.46 ccw(c14594.59,6733.46) 14594.59,6765.46 cw(c14594.59,6773.46) 14586.59,6773.46 14586.59,6875.46
VS on Top Layer "Top Layer-No Net 1" (solid, remove dead copper, pour order 40): 14626.59,6142.46 cw(c14585.59,6142.46) 14585.59,6101.46 14582.59,6101.46 ccw(c14582.59,6081.46) 14562.59,6081.46 14562.59,6016.46 ccw(c14612.59,6016.46) 14612.59,5966.46 14699.59,5966.46 ccw(c14699.59,6000.46) 14733.59,6000.46 14733.59,6143.46
VS on Top Layer "Top Layer-No Net 1" (solid, remove dead copper, pour order 35): 13774.67,6874.46 14063.59,6874.46 14063.59,6767.46 13772,6767.11 13773,6768.11 13726.59,6768.11 13726.59,6822.46 13726.59,6874.46 13773,6874.46
VS on Top Layer "Top Layer-No Net 1" (solid, pour order 42): 14050,6863.46 14050,6788.46 ccw(c14071,6788.46) 14071,6767.46 14619,6767.46 ccw(c14619,6785.46) 14637,6785.46 14637,6857.46 ccw(c14620,6857.46) 14620,6874.46 14070,6874.46 ccw(c14070,6853.46) 14049,6853.46
NetJ6_2 on Top Layer "Top Layer-No Net 1" (solid, remove dead copper, pour order 36): 13563.01,6439.88 13702.01,6439.88 13719.44,6439.88 13713.58,6502.3 13713.15,6559.71 13712.01,6564.46 13707.62,6565.91 cw(c13709.01,6605.88) 13669.01,6605.88 13669.01,6648.88 ccw(c13646.01,6648.89) 13646.01,6671.88 13543.01,6671.88 13533.01,6661.88 13533.01,6469.88 ccw(c13563,6469.88)
NetJ6_2 on Top Layer "Top Layer-No Net 1" (solid, pour order 30): 13714.01,6438.88 13711.59,6438.88 13711.59,6564.88 13752.01,6564.88 cw(c13752.01,6482.88) 13834.01,6482.88 13834.01,6273.88 13734.01,6273.88 13734.01,6418.88 ccw(c13714.01,6418.88)
NetJ6_1 on Top Layer "Top Layer-No Net 1" (solid, pour order 31): 13346.01,6438.88 13343.59,6438.88 13343.59,6564.88 13384.01,6564.88 cw(c13384.01,6482.88) 13466.01,6482.88 13466.01,6273.88 13366.01,6273.88 13366.01,6418.88 ccw(c13346.01,6418.88)
NetJ6_4 on Top Layer "Top Layer-No Net 1" (solid, pour order 32): 14484.59,6443.46 14345.59,6443.46 14345.59,6570.08 ccw(c14338.59,6609.46) 14378.59,6609.46 14378.59,6652.46 cw(c14401.59,6652.46) 14401.59,6675.46 14504.59,6675.46 14514.59,6665.46 14514.59,6473.46 cw(c14484.59,6473.46) 14484.59,6443.46
NetJ6_4 on Top Layer "Top Layer-No Net 1" (solid, pour order 33): 14371.59,6442.88 14377.59,6442.88 14377.59,6568.88 14333.59,6568.88 ccw(c14333.59,6486.88) 14251.59,6486.88 14251.59,6277.88 14351.59,6277.88 14351.59,6422.88 cw(c14371.59,6422.88)
NetJ6_3 on Top Layer "Top Layer-No Net 1" (solid, pour order 34): 13982.59,6439.88 13988.59,6439.88 13988.59,6565.88 13944.59,6565.88 ccw(c13944.59,6483.88) 13862.59,6483.88 13862.59,6274.88 13962.59,6274.88 13962.59,6419.88 cw(c13982.59,6419.88)
VS on Top Layer "Top Layer-No Net 1" (solid, pour order 41): 14637.59,6126.46 14712.59,6126.46 ccw(c14712.59,6147.46) 14733.59,6147.46 14733.59,6695.46 ccw(c14715.59,6695.46) 14715.59,6713.46 14643.59,6713.46 ccw(c14643.59,6696.46) 14626.59,6696.46 14626.59,6146.46 ccw(c14647.59,6146.46) 14647.59,6125.46
VS on Top Layer "Top Layer-No Net 1" (solid, remove dead copper, pour order 43): 13153,6863.46 13153,6788.46 ccw(c13174,6788.46) 13174,6767.46 13722,6767.46 ccw(c13722,6785.46) 13740,6785.46 13740,6857.46 ccw(c13723,6857.46) 13723,6874.46 13173,6874.46 ccw(c13173,6853.46) 13152,6853.46
NetJ6_1 on Top Layer "Top Layer-No Net 1" (solid, remove dead copper, pour order 38): 13195.01,6439.88 13334.01,6439.88 13351.44,6439.88 13345.58,6502.3 13345.15,6559.71 13344.01,6564.46 13339.62,6565.91 cw(c13341.01,6605.88) 13301.01,6605.88 13301.01,6648.88 ccw(c13278.01,6648.89) 13278.01,6671.88 13175.01,6671.88 13165.01,6661.88 13165.01,6469.88 ccw(c13195,6469.88)
NetJ6_3 on Top Layer "Top Layer-No Net 1" (solid, remove dead copper, pour order 39): 14095.59,6440.46 13956.59,6440.46 13956.59,6567.08 ccw(c13949.59,6606.46) 13989.59,6606.46 13989.59,6649.46 cw(c14012.59,6649.46) 14012.59,6672.46 14115.59,6672.46 14125.59,6662.46 14125.59,6470.46 cw(c14095.59,6470.46) 14095.59,6440.46
GND on Top Layer "Top Layer-No Net 1" (solid, remove dead copper, pour order 56): 13302.59,6326.46 13302.59,6284.46 cw(c13286.59,6284.46) 13286.59,6268.46 13184.59,6268.46 cw(c13184.59,6287.46) 13165.59,6287.46 13165.59,6395.46 cw(c13180.59,6395.46) 13180.59,6410.46 13287.59,6410.46 cw(c13287.59,6395.46) 13302.59,6395.46 13302.59,6325.46
GND on Top Layer "Top Layer-No Net 1" (solid, remove dead copper, pour order 55): 13670.59,6326.46 13670.59,6284.46 cw(c13654.59,6284.46) 13654.59,6268.46 13552.59,6268.46 cw(c13552.59,6287.46) 13533.59,6287.46 13533.59,6395.46 cw(c13548.59,6395.46) 13548.59,6410.46 13655.59,6410.46 cw(c13655.59,6395.46) 13670.59,6395.46 13670.59,6325.46
GND on Top Layer "Top Layer-No Net 1" (solid, remove dead copper, pour order 54): 14127.59,6326.46 14127.59,6284.46 cw(c14111.59,6284.46) 14111.59,6268.46 14009.59,6268.46 cw(c14009.59,6287.46) 13990.59,6287.46 13990.59,6395.46 cw(c14005.59,6395.46) 14005.59,6410.46 14112.59,6410.46 cw(c14112.59,6395.46) 14127.59,6395.46 14127.59,6325.46
GND on Top Layer "Top Layer-No Net 1" (solid, remove dead copper, pour order 53): 14515.59,6326.46 14515.59,6284.46 cw(c14499.59,6284.46) 14499.59,6268.46 14397.59,6268.46 cw(c14397.59,6287.46) 14378.59,6287.46 14378.59,6395.46 cw(c14393.59,6395.46) 14393.59,6410.46 14500.59,6410.46 cw(c14500.59,6395.46) 14515.59,6395.46 14515.59,6325.46
NetJ6_1 on Top Layer "Top Layer-No Net 1" (solid, pour order 37): 13366.02,6274.42 13366.02,6214.46 ccw(c13466.02,6214.46) 13466.02,6114.46 13481.59,6114.46 13508.59,6114.46 cw(c13508.59,6060.46) 13562.59,6060.46 ccw(c13627.59,6060.46) 13627.59,5995.46 13754.59,5995.46 13779.59,5995.46 ccw(c13779.59,6023.46) 13807.59,6023.46 13807.59,6086.46 ccw(c13786.59,6086.46) 13786.59,6107.46 13658.59,6107.46 cw(c13658.59,6129.46) 13636.59,6129.46 ccw(c13583.59,6129.46) 13583.59,6182.46 13559.59,6182.46 13557.97,6182.46 cw(c13557.97,6274.42) 13466.01,6274.42
GND on Top Layer "Top Layer-No Net 1" (solid, remove dead copper, pour order 71): 12390,5778 12390,8503 12712.8,8503 14750.91,8503 14750.91,8493 14750.91,5761.54 14754.21,5761.54 12388.78,5761.54 12388.78,5766.94
GND on Bottom Layer "Top Layer-No Net 1" (solid, remove dead copper, pour order 52): 12220,8608 12220,5357 13835,5357 15241,5357 15241,5544 15241,8600.46 14995.59,8600.46 12220,8600.46 12220,8601

## Keep-outs
Keep-Out Layer:
  lines w10: 12401.57,8513.46 14763.7,8513.46 14763.7,5798.46 ; 12402.79,5798.46 12402.79,8513.46 ; 12410.67,5788.62 14765.67,5788.62

## Other copper
Top Layer:
  pour cut-out: 13475.59,7066.46 13679.59,7066.46 13679.59,6901.46 13474.59,6901.46 13474.59,7064.46
  pour cut-out: 14574.79,6270.97 14574.79,6392.46 14629.59,6392.46 14629.59,6284.46 14636.59,6284.46 14636.59,6273.46 14578.59,6273.46
  pour cut-out: 14230.59,6362.46 14579.59,6362.46 14579.59,6599.46 14230.59,6599.46
  pour cut-out: 13101.09,6200.46 13351.44,6200.46 13352.59,6215.46 13353.48,6218.93 13358.83,6347.31 13298.59,6437.46 13101.09,6437.46
  pour cut-out: 13940.09,6203.46 14289.09,6203.46 14289.09,6440.46 13940.09,6440.46
  pour cut-out: 13204.59,7221.46 13528.59,7213.46 13520.59,7071.46 13439.59,7008 13283.59,6990.46 13210.59,7227.46
  pour cut-out: 12601.29,7762.65 12601.59,7588.46 12698.59,7598.46 12748.59,7675.46 12746.59,7767.46 12601.29,7768.06
  pour cut-out: 13717.59,6753.46 14089.59,6753.46 14095.59,6694.46 14092.59,6687.46 14025.59,6684.46 13984.59,6668.46 13975.59,6624.46 13973.59,6585.46 13932.59,6578.46 13891.59,6557.46 13851.59,6496.46 13808.59,6552.46 13751.81,6585.67 13726.59,6581.46 13721.59,6756.46
  pour cut-out: 14256.59,6699.46 14254.59,6557.46 14354.59,6588.46 14367.59,6650.46 14339.59,6691.46 14327.59,6714.46 14257.59,6699.46
  pour cut-out: 13284.59,6753.46 13488.59,6753.46 13488.59,6532.46 13483.59,6532.46 13410.59,6570.46 13341.59,6575.46 13284.59,6751.46
  pour cut-out: 13173.59,6991.46 13307.59,6991.46 13307.59,6836.46 13152.97,6836.46 13152.97,6988.46 13173.59,6988.46
  pour cut-out: 13612.59,7355.46 13612.59,7507.46 14071.59,7507.46 14071.59,7351.28 13612,7351.28
  pour cut-out: 13447.59,7470.46 13540.59,7470.46 13540.59,7285.46 13445.59,7285.46 13445.59,7466.46
  pour cut-out: 14304.53,8178.53 14304.53,8129.46 14365.59,8129.46 14365.59,8178.53
  pour cut-out: 13731,8378 13841.59,8378 13841.59,8199.46 13732.59,8199.46 13732.59,8393.46
  pour cut-out: 13485.59,8396.46 13440.59,8344.46 13449.54,8279.59 13440.59,8266.46 13696.09,8212.96 13734.59,8332.46 13734.59,8394.46 13502.59,8394.46 13502.59,8406.46 13480.59,8406.46
  pour cut-out: 13295.59,7741.46 13297.59,7741.46 13297.59,7683.46 13383.59,7683.46 13383.59,7734 13295,7734
  pour cut-out: 13184.59,7734 13184.59,7827.46 13249.59,7827.46 13249.59,7734
  pour cut-out: 13235,7621 13235,7588.46 13295.59,7588.46 13295.59,7622.46 13242.59,7622.46 13242.59,7621
  pour cut-out: 14392.59,6946.46 14392.59,6857.46 14576.59,6857.46 14576.59,6943.46 14389.59,6943.46
  pour cut-out: 12720.59,7622.46 12710.59,7622.46 12710.59,7232.46 12890.59,7232.46 12890.59,7650.46 12713.59,7650.46 12713.59,7627.46
  pour cut-out: 13732.59,8457.46 13732.59,8393.46 13981.59,8393.46 13981.59,8455.46 13749.59,8455.46 13749.59,8467.46 13727.59,8467.46
  pour cut-out: 14492.59,8302.46 14255,8302.46 14255,8440.46 14492.59,8440.46
  pour cut-out: 14346.59,7479.46 14346.59,6991.46 14471.59,6991.46 14471.59,7472.46 14349.59,7472.46 14349.59,7482.46
  pour cut-out: 13611.26,7291.28 13579.59,7291.28 13579.59,7210.46 13611.26,7210.46
  pour cut-out: 13184.59,6648.46 13196.59,6648.46 13196.59,6630.46 13184.59,6630.46
  pour cut-out: 13523.59,6440.46 13743.59,6440.46 13743.59,6356.46 13516.59,6356.46 13516.59,6442.46 13526.59,6442.46
  pour cut-out: 12827.59,6435.46 13101.59,6435.46 13101.59,6156.46 13205.53,6156.46 13205.53,6073.46 12981.36,6073.46 12981.36,6175.46 12959.59,6175.46 12959.59,6081.46 12885.59,6081.46 12885.59,6299.46 12829.59,6299.46 12829.59,6432.46
  pour cut-out: 14361.39,7869.46 14564.36,7869.46 14564.36,7719.46 14361.39,7719.46
  pour cut-out: 14565.47,8033.46 14472.59,8033.46 14472.59,7939.46 14565.47,7939.46
  pour cut-out: 13173.09,7805.46 13250.09,7805.46 13250.09,7468.46 13135.09,7468.46 13135.09,7809.46 13175.09,7809.46
  pour cut-out: 12977.05,6704.37 12989.14,6716.46 13049.59,6716.46 13049.59,6855.46 13005.59,6899.46 13000.59,6894.46 12949.59,6894.46 12949.59,6736.46 12969.58,6716.48 12979.85,6716.48
  pour cut-out: 12878.33,6568.51 12878.33,6630.72 12877.59,6631.46 12852.59,6606.46 12816.59,6606.46 12816.59,6563.46 12834.59,6545.46 12860.59,6545.46 12860.59,6550.77
  pour cut-out: 12773.59,7208.46 12773.59,7078.46 12880.59,7078.46 12880.59,7211.46 12774.59,7211.46
  pour cut-out: 13106.47,6000.47 12909.59,6000.47 12909.59,6134.46 13050.59,6134.46 13050.59,6007.37 13106.47,6007.37
  pour cut-out: 13205.53,6000.75 13311.59,6000.75 13311.59,6086.46 13187.59,6086.46 13187.59,6005.74 13205.53,6005.74

## Silkscreen, mask and mechanical layers (free items; w line width, h text height)
Top Overlay:
  lines w10: 13413.59,7256.46 13454.59,7215.46 13454.59,6892.46
Mechanical 1:
  lines w10: 12401.57,5787.4 12401.57,8514.46 14763.78,8514.46 14763.78,5787.4 12401.57,5787.4

## Text inside footprints (layer, text, board x,y; h text height)
J1: Bottom Overlay "15" at 12818.9,7857.28 h45; Bottom Overlay "16" at 12525.59,7857.28 h45
J2: Bottom Overlay "1" at 12802.17,7555.12 h45; Bottom Overlay "2" at 12536.42,7577.76 h45